# Altium PCB 388D_Control_v1_PCB1_harry.PcbDoc (part 3 of 5)
Units mil, origin at the board's own origin, x right, y up, seen from the top; angles counter-clockwise.
Board outline 4800 x 4000 mil, 6 copper layers (Top Layer, Singal Layer 2, Signal layer 3, Signal Layer 4, Signal Layer 5, Bottom Layer), stack 32.7 mil thick; 431 components, 469 nets, 2000 pads, 719 vias.
Unrouted connection lines stored in the file: 971.
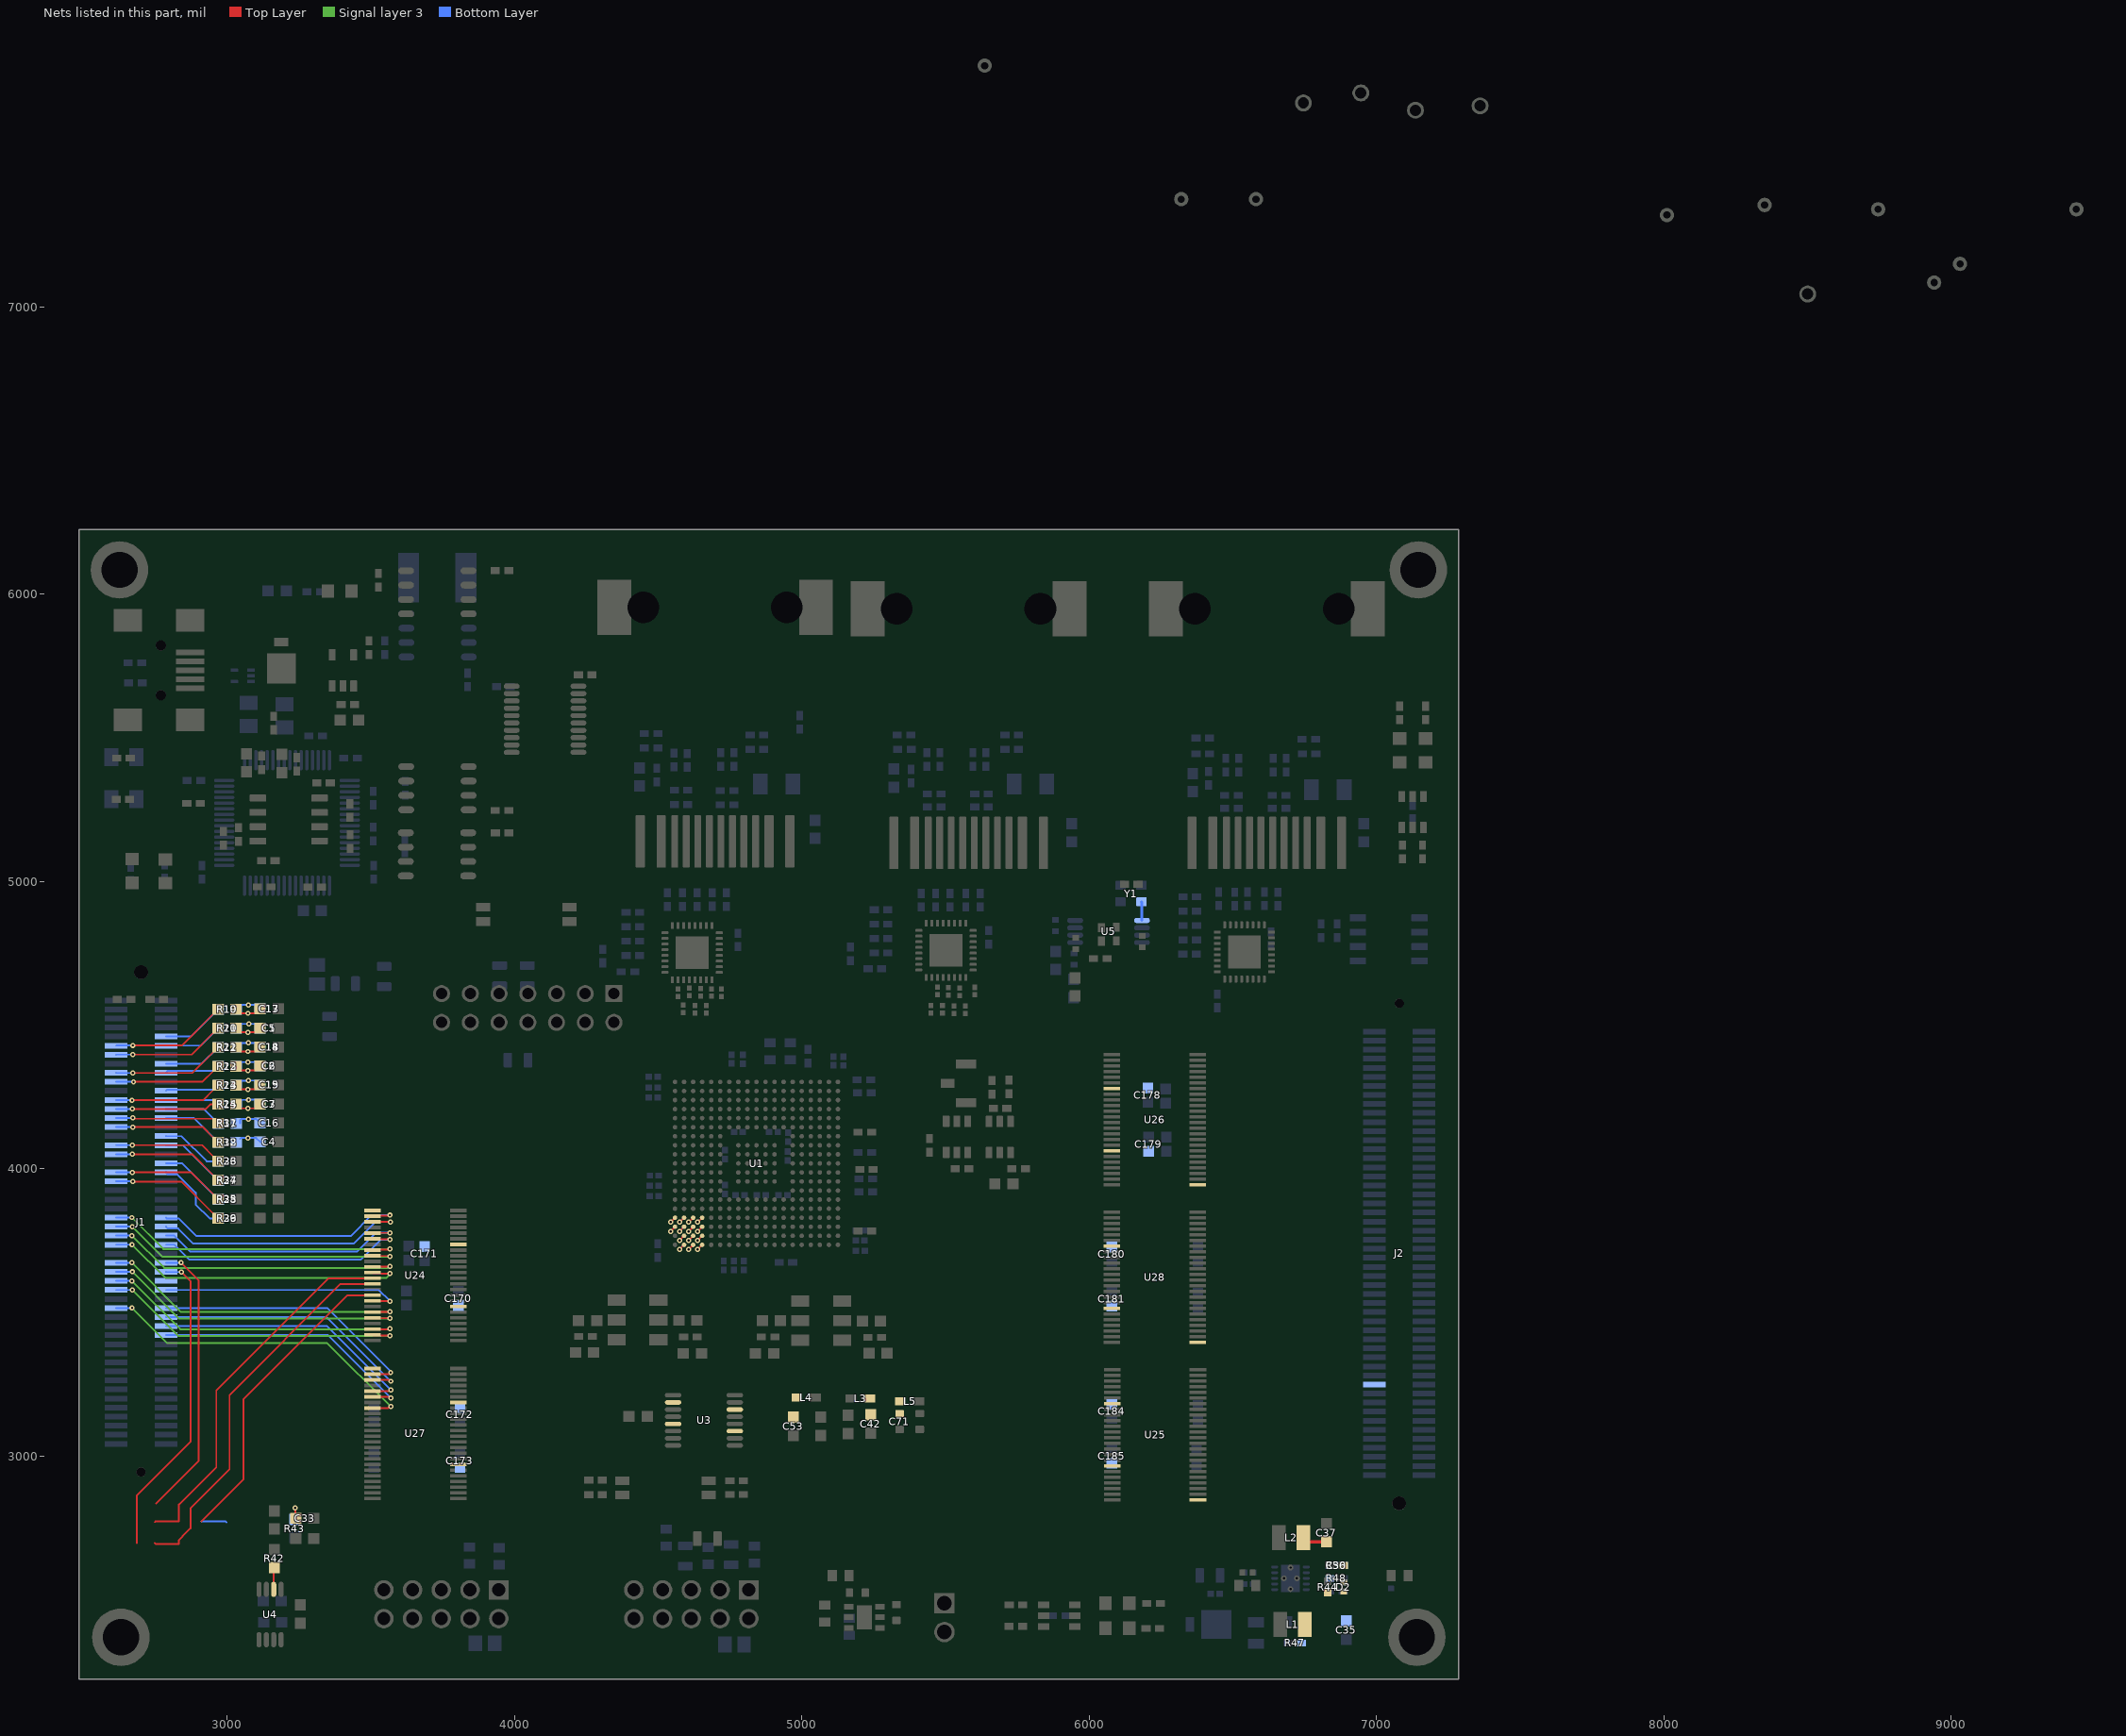
[diagram p3: the nets of this part, all layers, seen from the top]

## Part data (continued)
R77 R78 R81 R83: library part CMP-0026765-1, "RES, 10.0, 0.1%, 0.063 W, 0402", Manufacturer="TE Connectivity", Power_W=63mW, Supplier Part Number 1=A102583CT-ND, TempCo="25 ppm/C", Tolerance_%=0.1%, Value2=0.063W, Value_Code=10R0, ValueDisplayed=10.0, AEC Category=Q200, AEC Grade=N/A, AEC Qualified=N, ComponentLink1Description="Datasheet link", ComponentLink1URL=http://www.te.com/commerce/DocumentDelivery/DDEController?Action=srchrtrv&DocNm=1773200&DocType=DS&DocLang=English, CompType=Resistor, EIA_Code=E192, LatestRevisionDate=2017-03-09, MountType=SMT, PackageReference=0402, PartNumber=CPF0402B10RE1, Published=2008-06-26, Publisher="Texas Instruments", Res_ohm=10, RoHS=Y, SizeArea_mm2=0.5, SizeX_mm=1, SizeY_mm=0.5, SizeZ_mm=0.35, Supplier 1=Digi-Key, Supplier 2=Newark, Supplier 3=Mouser, Supplier Part Number 2=80P3855, Supplier Part Number 3=279-CPF0402B10RE1, Technology="Thin Film", U/M=EA, Value1=0.1%
R82 R84 R86: library part CMP-0081856-1, "RES, 0, 0%, 0.2 W, AEC-Q200 Grade 0, 0402", Manufacturer=Vishay-Dale, Power_W=200mW, Supplier Part Number 1=541-0.0YBTR-ND, Tolerance_%=0%, Value2=0.2W, Value_Code=0, AEC Category=Q200, AEC Grade=0, AEC Qualified=Y, ComponentLink1Description="Datasheet link", ComponentLink1URL=http://www.vishay.com/docs/20043/crcwhpe3.pdf, CompType=Resistor, MountType=SMT, PackageReference=0402, PartNumber=CRCW04020000Z0EDHP, Res_ohm=0, RoHS=Y, SizeArea_mm2=0.5, SizeAreaWB_mm2=3, SizeX_mm=1, SizeY_mm=0.5, SizeZ_mm=0.6, Supplier 1=Digi-Key, Supplier 2=Newark, Supplier 3=Mouser, Supplier Part Number 2=96Y9050, Supplier Part Number 3=71-CRCW04020000Z0EDH, Technology="Thick Film", Value1=0%, ValueDisplayed=0, VDC_V=50V
R87 R88 R90 R91 R98 R99 R105 R106 R119 R121 R129 R130: library part CMP-0026738-1, "RES, 49.9, 1%, 0.063 W, 0402", Manufacturer="Yageo America", Power_W=63mW, Supplier Part Number 1=311-49.9LRCT-ND, TempCo="100 ppm/C", Tolerance_%=1%, Value2=0.063W, Value_Code=49R9, ValueDisplayed=49.9, AEC Category=Q200, AEC Grade=N/A, AEC Qualified=N, ComponentLink1Description="Datasheet link", ComponentLink1URL=http://www.yageo.com/documents/recent/PYu-RC_Group_51_RoHS_L_1.pdf, CompType=Resistor, EIA_Code=E96, LatestRevisionDate=2017-03-09, MountType=SMT, PackageReference=0402, PartNumber=RC0402FR-0749R9L, Published=2008-06-26, Publisher="Texas Instruments", Res_ohm=49.9, RoHS=Y, SizeArea_mm2=0.5, SizeX_mm=1, SizeY_mm=0.5, SizeZ_mm=0.6, Supplier 1=Digi-Key, Supplier 2=Newark, Supplier 3=Mouser, Supplier Part Number 2=67R9942, Supplier Part Number 3=603-RC0402FR-0749R9L, Technology="Thick Film", U/M=EA, Value1=1%, VDC_V=50V
R89 R104 R128: library part CMP-0026413-2, "RES, 4.87 k, 1%, 0.063 W, AEC-Q200 Grade 0, 0402", Manufacturer=Vishay-Dale, Power_W=63mW, Supplier Part Number 1=541-4.87KLCT-ND, TempCo="100 ppm/C", Tolerance_%=1%, Value2=0.063W, Value_Code=4k87, ValueDisplayed=4.87k, AEC Category=Q200, AEC Grade=0, AEC Qualified=Y, ComponentLink1Description="Datasheet link", ComponentLink1URL=http://www.vishay.com/docs/20035/dcrcwe3.pdf, CompType=Resistor, EIA_Code=E96, MountType=SMT, PackageReference=0402, PartNumber=CRCW04024K87FKED, Res_ohm=4.87k, RoHS=E, SizeArea_mm2=0.5, SizeX_mm=1, SizeY_mm=0.5, SizeZ_mm=0.6, Supplier 1=Digi-Key, Supplier 2=Newark, Supplier 3=Mouser, Supplier Part Number 2=52K7047, Supplier Part Number 3=71-CRCW0402-4.87K-E3, Technology="Thick Film", Value1=1%, VDC_V=50V
R94 R110 R134: library part CMP-0026237-2, "RES, 2.49 k, 1%, 0.063 W, AEC-Q200 Grade 0, 0402", Manufacturer=Vishay-Dale, Power_W=63mW, Supplier Part Number 1=541-2.49KLCT-ND, TempCo="100 ppm/C", Tolerance_%=1%, Value2=0.063W, Value_Code=2k49, ValueDisplayed=2.49k, AEC Category=Q200, AEC Grade=0, AEC Qualified=Y, ComponentLink1Description="Datasheet link", ComponentLink1URL=http://www.vishay.com/docs/20035/dcrcwe3.pdf, CompType=Resistor, EIA_Code=E96, MountType=SMT, PackageReference=0402, PartNumber=CRCW04022K49FKED, Res_ohm=2.49k, RoHS=E, SizeArea_mm2=0.5, SizeX_mm=1, SizeY_mm=0.5, SizeZ_mm=0.6, Supplier 1=Digi-Key, Supplier 2=Newark, Supplier 3=Mouser, Supplier Part Number 2=52K6803, Supplier Part Number 3=71-CRCW0402-2.49K-E3, Technology="Thick Film", Value1=1%, VDC_V=50V
R96 R97 R109 R118 R133 R141: library part CMP-0025813-4, "RES, 470, 5%, 0.1 W, AEC-Q200 Grade 0, 0603", Manufacturer=Vishay-Dale, Power_W=100mW, Supplier Part Number 1=541-470GCT-ND, TempCo="200 ppm/C", Tolerance_%=5%, Value2=0.1W, Value_Code=470R, ValueDisplayed=470, AEC Category=Q200, AEC Grade=0, AEC Qualified=Y, ComponentLink1Description="Datasheet link", ComponentLink1URL=http://www.vishay.com/docs/20035/dcrcwe3.pdf, CompType=Resistor, EIA_Code=E24, MountType=SMT, PackageReference=0603, PartNumber=CRCW0603470RJNEA, Res_ohm=470, RoHS=E, SizeArea_mm2=1.28, SizeX_mm=1.6, SizeY_mm=0.8, SizeZ_mm=1, Supplier 1=Digi-Key, Supplier 2=Newark, Supplier 3=Mouser, Supplier Part Number 2=59M6817, Supplier Part Number 3=71-CRCW0603J-470-E3, Technology="Thick Film", Value1=5%, VDC_V=75V
R100 R101 R176 R177: library part CMP-0026938-5, "RES, 4.7 k, 5%, 0.063 W, AEC-Q200 Grade 0, 0402", Manufacturer=Vishay-Dale, Power_W=63mW, Supplier Part Number 1=541-4.7KJCT-ND, TempCo="200 ppm/C", Tolerance_%=5%, Value2=0.063W, Value_Code=4k70, ValueDisplayed=4.7k, AEC Category=Q200, AEC Grade=0, AEC Qualified=Y, ComponentLink1Description="Datasheet link", ComponentLink1URL=http://www.vishay.com/docs/20035/dcrcwe3.pdf, CompType=Resistor, EIA_Code=E24, MountType=SMT, PackageReference=0402, PartNumber=CRCW04024K70JNED, Res_ohm=4.7k, RoHS=E, SizeArea_mm2=0.5, SizeX_mm=1, SizeY_mm=0.5, SizeZ_mm=0.6, Supplier 1=Digi-Key, Supplier 2=Newark, Supplier 3=Mouser, Supplier Part Number 2=59M6733, Supplier Part Number 3=71-CRCW0402J-4.7K-E3, Technology="Thick Film", Value1=5%, VDC_V=50V
R102 R103 R111 R112 R113 R114 R115 R116 R125 R126 R127 R135 R136 R137 R138 R139: library part CMP-0027010-2, "RES, 2.2 k, 5%, 0.05 W, 0201", Manufacturer=Vishay-Dale, Power_W=50mW, Supplier Part Number 1=541-2.2KAGCT-ND, TempCo="200 ppm/C", Tolerance_%=5%, Value2=0.05W, Value_Code=2k20, ValueDisplayed=2.2k, AEC Category=Q200, AEC Grade=N/A, AEC Qualified=N, ComponentLink1Description="Datasheet link", ComponentLink1URL=http://www.vishay.com/docs/20052/crcw0201e3.pdf, CompType=Resistor, EIA_Code=E24, MountType=SMT, PackageReference=0201, PartNumber=CRCW02012K20JNED, Res_ohm=2.2k, RoHS=E, SizeArea_mm2=0.18, SizeX_mm=0.6, SizeY_mm=0.3, SizeZ_mm=0.26, Supplier 1=Digi-Key, Supplier 2=Newark, Supplier 3=Mouser, Supplier Part Number 2=48P7324, Supplier Part Number 3=71-CRCW02012K20JNED, Technology="Thick Film", Value1=5%, VDC_V=30V
R120: library part CMP-0026081-3, "RES, 1.27 k, 1%, 0.063 W, AEC-Q200 Grade 0, 0402", Manufacturer=Vishay-Dale, Power_W=63mW, Supplier Part Number 1=541-1.27KLCT-ND, TempCo="100 ppm/C", Tolerance_%=1%, Value2=0.063W, Value_Code=1k27, ValueDisplayed=1.27k, AEC Category=Q200, AEC Grade=0, AEC Qualified=Y, ComponentLink1Description="Datasheet link", ComponentLink1URL=http://www.vishay.com/docs/20035/dcrcwe3.pdf, CompType=Resistor, EIA_Code=E96, MountType=SMT, PackageReference=0402, PartNumber=CRCW04021K27FKED, Res_ohm=1.27k, RoHS=E, SizeArea_mm2=0.5, SizeX_mm=1, SizeY_mm=0.5, SizeZ_mm=0.6, Supplier 1=Digi-Key, Supplier 2=Newark, Supplier 3=Mouser, Supplier Part Number 2=52K6562, Supplier Part Number 3=71-CRCW0402-1.27K-E3, Technology="Thick Film", Value1=1%, VDC_V=50V
R143 R145 R149 R156: library part CMP-0026825-5, "RES, 10 k, 5%, 0.063 W, AEC-Q200 Grade 0, 0402", Manufacturer=Vishay-Dale, Power_W=63mW, Supplier Part Number 1=541-10KJCT-ND, TempCo="200 ppm/C", Tolerance_%=5%, Value2=0.063W, Value_Code=10k0, ValueDisplayed=10k, AEC Category=Q200, AEC Grade=0, AEC Qualified=Y, ComponentLink1Description="Datasheet link", ComponentLink1URL=http://www.vishay.com/docs/20035/dcrcwe3.pdf, CompType=Resistor, EIA_Code=E24, MountType=SMT, PackageReference=0402, PartNumber=CRCW040210K0JNED, Res_ohm=10k, RoHS=E, SizeArea_mm2=0.5, SizeX_mm=1, SizeY_mm=0.5, SizeZ_mm=0.6, Supplier 1=Digi-Key, Supplier 2=Newark, Supplier 3=Mouser, Supplier Part Number 2=59M6696, Supplier Part Number 3=71-CRCW0402J-10K-E3, Technology="Thick Film", Value1=5%, VDC_V=50V
R144 R152 R153 R155: library part CMP-0026822-3, "RES, 0, 5%, 0.063 W, AEC-Q200 Grade 0, 0402", Manufacturer=Vishay-Dale, Power_W=63mW, Supplier Part Number 1=541-0.0JCT-ND, TempCo="200 ppm/C", Tolerance_%=5%, Value2=0.063W, Value_Code=0000, ValueDisplayed=0, AEC Category=Q200, AEC Grade=0, AEC Qualified=Y, ComponentLink1Description="Datasheet link", ComponentLink1URL=http://www.vishay.com/docs/20035/dcrcwe3.pdf, CompType=Resistor, EIA_Code=E24, MountType=SMT, PackageReference=0402, PartNumber=CRCW04020000Z0ED, Res_ohm=0, RoHS=E, SizeArea_mm2=0.5, SizeX_mm=1, SizeY_mm=0.5, SizeZ_mm=0.6, Supplier 1=Digi-Key, Supplier 2=Newark, Supplier 3=Mouser, Supplier Part Number 2=52K6543, Supplier Part Number 3=71-CRCW0402-0-E3, Technology="Thick Film", Value1=5%, VDC_V=50V
R146 R147 R148 R151: library part CMP-0026852-3, "RES, 1.0 k, 5%, 0.063 W, AEC-Q200 Grade 0, 0402", Manufacturer=Vishay-Dale, Power_W=63mW, Supplier Part Number 1=541-1.0KJCT-ND, TempCo="200 ppm/C", Tolerance_%=5%, Value2=0.063W, Value_Code=1k00, ValueDisplayed=1.0k, AEC Category=Q200, AEC Grade=0, AEC Qualified=Y, ComponentLink1Description="Datasheet link", ComponentLink1URL=http://www.vishay.com/docs/20035/dcrcwe3.pdf, CompType=Resistor, EIA_Code=E24, MountType=SMT, PackageReference=0402, PartNumber=CRCW04021K00JNED, Res_ohm=1k, RoHS=E, SizeArea_mm2=0.5, SizeX_mm=1, SizeY_mm=0.5, SizeZ_mm=0.6, Supplier 1=Digi-Key, Supplier 2=Newark, Supplier 3=Mouser, Supplier Part Number 2=59M6691, Supplier Part Number 3=71-CRCW0402J-1.0K-E3, Technology="Thick Film", Value1=5%, VDC_V=50V
R154: library part CMP-0026834-3, "RES, 12 k, 5%, 0.063 W, AEC-Q200 Grade 0, 0402", Manufacturer=Vishay-Dale, Power_W=63mW, Supplier Part Number 1=541-12KJCT-ND, TempCo="200 ppm/C", Tolerance_%=5%, Value2=0.063W, Value_Code=12k0, ValueDisplayed=12k, AEC Category=Q200, AEC Grade=0, AEC Qualified=Y, ComponentLink1Description="Datasheet link", ComponentLink1URL=http://www.vishay.com/docs/20035/dcrcwe3.pdf, CompType=Resistor, EIA_Code=E24, MountType=SMT, PackageReference=0402, PartNumber=CRCW040212K0JNED, Res_ohm=12k, RoHS=E, SizeArea_mm2=0.5, SizeX_mm=1, SizeY_mm=0.5, SizeZ_mm=0.6, Supplier 1=Digi-Key, Supplier 2=Newark, Supplier 3=Mouser, Supplier Part Number 2=89M6603, Supplier Part Number 3=71-CRCW040212K0JNED, Technology="Thick Film", Value1=5%, VDC_V=50V
R157: library part CMP-009-00014-5, Case/Package=0603, Max Operating Temperature=155°C, Min Operating Temperature=-55°C, Power=100mW, Tolerance=1%, Voltage Rating=50V, Mounting Technology=SM, Pins=2, RoHS Compliant=True
R158 R159 R162 R170 R171 R172 R173 R174 R175: library part CMP-009-00174-4, "Chip Resistor, 4,7 Ohms, +/-5 %, 125 mW, -55 to 155 degC, 0805", Case/Package=0805, Max Operating Temperature=155°C, Min Operating Temperature=-55°C, Power=125mW, Tolerance=5%, Pins=2
R160 R161: library part CMP-009-00014-5, "Chip Resistor, 1 KOhm, +/-1%, 0.1 W, -55 to 155 degC, 0603 (1608 Metric)", Case/Package=0603, Max Operating Temperature=155°C, Min Operating Temperature=-55°C, Power=100mW, Tolerance=1%, Voltage Rating=50V, Mounting Technology=SM, Pins=2, RoHS Compliant=True
S1 S2: library part CMP-0002233-1, "Switch, Dual SPDT,  2 Pos, 0.1A, 6VDC, SMD", CurrentRating_mA=100A, Manufacturer="Copal Electronics", Supplier Part Number 1=CASD20JCT-ND, Circuit=SPDT, ComponentLink1Description="Datasheet Link", ComponentLink1URL=http://www.nidec-copal-electronics.com/e/catalog/switch/cas.pdf, CompType=Switch, LatestRevisionDate=2017-03-09, MountType=SMT, Orientation="Top Actuated", PackageReference=5.4x3.9mm, PartNumber=CAS-D20TA, PositionCount=2, Publisher="Texas Instruments", RoHS=Y, Supplier 1=Digi-Key, SwitchFunction=On-On, VDC_V=6V
S3: library part CMP-0002193-2, "Switch, SPST-NO, Off-Mom, 12 V, SMD", CurrentRating_mA=50A, Manufacturer="Omron Electronic Components", Supplier Part Number 1=SW1021CT-ND, Circuit=SPST-NO, ComponentLink1Description="Datasheet URL", ComponentLink1URL=http://www.omron.com/ecb/products/pdf/en-b3u.pdf, CompType=Switch, LatestRevisionDate=2017-03-09, MountType=SMT, Orientation="Top Actuated", PackageReference="SMD, 3-Leads, Body 3x2.5mm", PartNumber=B3U-1100P, PositionCount=1, Publisher="Texas Instruments", RoHS=Y, Supplier 1=Digi-Key, Supplier 2=Newark, Supplier 3=Mouser, Supplier Part Number 2=39M4619, Supplier Part Number 3=653-B3U-1100P, SwitchFunction=Off-Mom, VDC_V=12V
S4 S5: library part CMP-0002230-1, "Switch, SPST, 2 Pos, 25mA, 24VDC, SMD", CurrentRating_mA=25A, Manufacturer="CTS Electrocomponents", Supplier Part Number 1=CT2182LPST-ND, Circuit=SPST, ComponentLink1Description="Datasheet Link", ComponentLink1URL=http://www.ctscorp.com/components/Datasheets/218.pdf, CompType=Switch, LatestRevisionDate=2017-03-09, MountType=SMT, Orientation="Top Actuated", PackageReference=3.71x5.8mm, PartNumber=218-2LPST, PositionCount=2, Publisher="Texas Instruments", RoHS=Y, Supplier 1=Digi-Key, Supplier 2=Mouser, Supplier Part Number 2=774-2182LPST, SwitchFunction=Off-On, VDC_V=24V
TP1 TP2 TP3 TP4 TP14: library part CMP-002-00037-2, "Test Point, Orange, Height 4.6 mm, Tail Length 3 mm, 1-Pin THD, RoHS", Colour=Orange, Manufacturer=Keystone, Package Description="1-Pin Through Hole Device, Dia 2.54 mm", Package Quantity=10, Case/Package=5003, Connector Type=TestPoint, Contact Material=Bronze, Contact Plating=Tin, Datasheet URL=http://keyelco.com/userAssets/file/M65p56.pdf, Datasheet Version=Jun-15, Diameter=2.54mm, Manufacturer URL=http://www.keyelco.com/, Mounting Technology=TH, Package Reference=5003, Packaging=Bulk, Pins=1, RoHS Compliant=True
TP5 TP6 TP7 TP8 TP9 TP10 TP11 TP12 TP13: library part CMP-0078143-3, "TEST POINT.  No entry in BOM.", Manufacturer=N/A, CompType=Testpoint, PackageReference=N/A, PartNumber=N/A
U1: library part CMP-012-000147-1, "TMS320F28388DZWTS, ZWT0337A (NFBGA-337)", Alternate Manufacturer="Texas Instruments", AEC Category=Q200, AEC Qualified=N, Available Preview Images=2D, ComponentLink1Description="Datasheet Link", ComponentLink1URL=http://www.ti.com/lit/ds/symlink/tms320f28388d.pdf, ComponentLink2Description="Product Folder", ComponentLink2URL=http://www.ti.com/product/tms320f28388d, ComponentLink3Description="Online Datasheet", ComponentLink3URL=http://www.ti.com/product/tms320f28388d/datasheet, CompType=IC, Design Item ID=TMS320F28388DZWTS, Manufacturer="Texas Instruments", MountType=SMT, PackageDescription=NFBGA-337, PackageReference=ZWT0337A, PartNumber=TMS320F28388DZWTS, SizeArea_mm2=256, SizeAreaWB_mm2=324, SizeX_mm=16, SizeY_mm=16, SizeZ_mm=1.4, Source=SamacSys.SchLib
U2: library part CMP-0051789-2, "Dual Buffer/Driver with Open-Drain Output, DBV0006A, LARGE T&R", F @ Nom Voltage(Max)(Mhz)=150, Generic Part Number=SN74LVC2G07, ICC @ Nom Voltage(Max)(mA)=0.01, Manufacturer="Texas Instruments", Operating Temperature Range(C)="-40 to 125", Rating=Catalog, tpd @ Nom Voltage(Max)(ns)=8.6,4.4,3.7,2.9, Voltage(Nom)(V)=1.8,2.5,3.3,5, 3-State Output=No, AEC Category=Q200, AEC Qualified=N, Bits(#)=2, ComponentLink1Description="Datasheet Link", ComponentLink1URL=http://www.ti.com/lit/ds/symlink/sn74lvc2g07.pdf, ComponentLink2Description="Product Folder", ComponentLink2URL=http://www.ti.com/product/sn74lvc2g07, ComponentLink3Description="Online Datasheet", ComponentLink3URL=http://www.ti.com/product/sn74lvc2g07/datasheet, CompType=IC, DatasheetVersion=SCES308K, Green_EU RoHS=Passed, Green_EU RoHS-2=Passed, Green_Lifecycle=Active, Green_REACh=Passed, Input Type=CMOS/TTL, Logic=True, MountType=SMT, Output Drive (IOL/IOH)(Max)(mA)=32/-32, Output Type=CMOS, PackageDescription=SOT-23-6, PackageReference=DBV0006A, PartNumber=SN74LVC2G07DBVR, RoHS=Y, Schmitt Trigger=No, SizeArea_mm2=8.12, SizeAreaWB_mm2=14.82, SizeX_mm=2.8, SizeY_mm=2.9, SizeZ_mm=1.45, Sub-Family="Inverting Buffer/Driver", Technology Family=LVC, VCC(Max)(V)=5.5, VCC(Min)(V)=1.65
U3: library part CMP-014-00004-2, "High-Speed, Single-Supply, Rail-to-Rail Operational Amplifier MicroAmplifier(TM) Series, 2.7 to 5.5 V, -55 to 150 degC, 16-pin SOP (DBQ16), Green (RoHS & no Sb/Br)", Case/Package="16-Pin, Plastic Small Outline, Body 3.9 x 4.9 mm, Pitch 0.635 mm", Manufacturer="Texas Instruments", Total Supply Voltage(Max)(+5V is 5, +/-5V is 10)=5.5, Total Supply Voltage(Min)(+5V is 5, +/-5V is 10)=2.7, Available Preview Images=2D, CMRR(Min)(dB)=66, Code_JEDEC=MO-137, ComponentLink1Description="Manufacturer URL", ComponentLink1URL=http://www.ti.com/, ComponentLink2Description=Datasheet, ComponentLink2URL=http://www.ti.com/general/docs/lit/getliterature.tsp?genericPartNumber=OPA4350&fileType=pdf, ComponentLink3Description="Package Specification", ComponentLink3URL=http://www.ti.com/litv/pdf/msoi004g, DatasheetVersion=SBOS099C, Design Item ID=CMP-0041147-1, Eco-Plan="Green (RoHS & no Sb/Br)", IIB(Max)(pA)=10, Iq per channel(Max)(mA)=7.5, Mounting Technology="Surface Mount", Number of Channels=4, Offset Drift(Typ)(uV/C)=4, PackageReference=DBQ0016A, PackageVersion="4073301-2/H, 10/2008", Slew Rate(Typ)(V/us)=22, Source=SamacSys.SchLib, Sub Family="Low Input Bias Current Amp (<=10pA), Low Offset Voltage Amplifier (<=500uV), Low Supply Voltage Amplifier (<=2.7V), Precision Amplifier", Vio (25C)(Max)(mV)=0.5, Vn at 1kHz(Typ)(nV/rtHz)=18
U4: library part CMP-0032596-2, "Low Noise, Very Low Drift, Precision Series Voltage Reference, DGK0008A (VSSOP-8)", Manufacturer="Texas Instruments", Rating=Catalog, Temp Coeff(Max)(ppm/ degree C)=3, AEC Category=Q200, AEC Qualified=N, Code_JEDEC=MO-187-AA, ComponentLink1Description="Datasheet Link", ComponentLink1URL=http://www.ti.com/lit/ds/symlink/ref5030.pdf, ComponentLink2Description="Product Folder", ComponentLink2URL=http://www.ti.com/product/ref5030, ComponentLink3Description="Online Datasheet", ComponentLink3URL=http://www.ti.com/product/ref5030/datasheet, CompType=IC, DatasheetVersion=SBOS410E, Eco-Plan="Green (RoHS & no Sb/Br)", Initial Accuracy @ 25/deg C(%)=0.05, Iout/Iz(Max)(mA)=10, Iq(Max)(uA)=1000, MountType=SMT, PackageDescription=VSSOP-8, PackageReference=DGK0008A, PackageVersion=4073329/E, PartNumber=REF5030IDGKT, RoHS=Y, SizeArea_mm2=14.7, SizeAreaWB_mm2=23.6, SizeX_mm=4.9, SizeY_mm=3, SizeZ_mm=1.1, SubFamily="Series Voltage Reference", VI(Max)(V)=18, VI(Min)(V)=3.2, VO(V)=3
U5: library part CMP-052-000006-1, "Low Jitter, 1:4 LVCMOS Fan-out Clock Buffer, PW0008A (TSSOP-8)", Alternate Manufacturer="Texas Instruments", Available Preview Images=2D, ComponentLink1Description="Datasheet Link", ComponentLink1URL=http://www.ti.com/lit/ds/symlink/cdclvc1104.pdf, CompType=IC, Design Item ID=CDCLVC1104PW, Green_EU RoHS=Passed, Green_EU RoHS-2=Passed, Green_Lifecycle=Active, Green_REACh=Passed, LatestRevisionDate=2017-06-09, Manufacturer="Texas Instruments", MountType=SMT, PackageDescription=TSSOP-8, PackageReference=PW0008A, PartNumber=CDCLVC1104PW, Publisher="Texas Instruments", RoHS=Y, SizeArea_mm2=19.2, SizeAreaWB_mm2=42.0, SizeX_mm=6.4, SizeY_mm=3.0, SizeZ_mm=1.2, Source=MCU063B.SCHLIB, U/M=EA
U6 U7: library part CMP-052-000005-1, "High-Accuracy, Fixed-Threshold OV/UV Monitor, DDC0006A (SOT-23-T-6)", Alternate Manufacturer="Texas Instruments", Alternate PartNumber=TPS3702CX33DDCR, AEC Category=Q200, AEC Qualified=N, Available Preview Images=2D, ComponentLink1Description="Datasheet Link", ComponentLink1URL=http://www.ti.com/lit/ds/symlink/tps3702.pdf, ComponentLink2Description="Product Folder", ComponentLink2URL=http://www.ti.com/product/tps3702, ComponentLink3Description="Online Datasheet", ComponentLink3URL=http://www.ti.com/product/tps3702/datasheet, CompType=IC, Design Item ID=TPS3702CX33DDCT, Manufacturer="Texas Instruments", MountType=SMT, PackageDescription=SOT-23-T-6, PackageReference=DDC0006A, PartNumber=TPS3702CX33DDCT, RoHS=Y, SizeArea_mm2=4.8675, SizeAreaWB_mm2=10.4675, SizeX_mm=1.65, SizeY_mm=2.95, SizeZ_mm=0.87, Source=MCU063B.SCHLIB
U8: library part CMP-014-000012-1, "Dual, Adjustable, 600mA and 1000mA, 2.25MHz Step-Down Converter with 1-Wire Interface in QFN 10-VSON -40 to 85", Alternate_PartNumber=TPS62420DRCT, Manufacturer="Texas Instruments", CompType=IC, Copyright="Copyright (C) 2025 Ultra Librarian. All rights reserved.", Design Item ID=TPS62420DRCR, Manufacturer_Name="Texas Instruments", Manufacturer_Part_Number=TPS62420DRCR, MountType=SMT, PackageReference=DRC0010J, PartNumber=TPS62420DRCR, RefDes=RefDes, RoHS=Y, Source=SamacSys.SchLib, Type=TYPE
U9 U10 U11: library part CMP-0076010-4, "Robust, Low Power 10/100 Ethernet Physical Layer Transceiver, RHB0032B (VQFN-32)", Alternate Manufacturer="Texas Instruments", Alternate PartNumber=DP83822IRHBT, AEC Category=Q200, AEC Qualified=N, ComponentLink1Description="Datasheet Link", ComponentLink1URL=http://www.ti.com/lit/ds/symlink/dp83822i.pdf, ComponentLink2Description=ComponentLink2Description, ComponentLink2URL=http://www.ti.com/product/dp83822i, ComponentLink3Description="Online Datasheet", ComponentLink3URL=http://www.ti.com/product/GPN/datasheet, CompType=IC, Manufacturer="Texas Instruments", MountType=SMT, PackageDescription=VQFN-32, PackageReference=RHB0032B, PartNumber=DP83822IRHBR, RoHS=Y, SizeArea_mm2=25.0, SizeAreaWB_mm2=49.0, SizeX_mm=5.0, SizeY_mm=5.0, SizeZ_mm=1.0
U12: library part CMP-0082059-1, "16 Kb I2C EEPROM Serial, SOIC-8", Manufacturer="ON Semiconductor", Supplier Part Number 1=CAT24C16WI-GT3CT-ND, ComponentLink1Description="Datasheet URL", ComponentLink1URL=https://www.onsemi.com/pub/Collateral/CAT24C01-D.PDF, MountType=SMT, PackageReference=SOIC-8, PartNumber=CAT24C16WI-GT3, RoHS=Y, SizeArea_mm2=29.351, SizeAreaWB_mm2=55.131, SizeX_mm=5.99, SizeY_mm=4.9, SizeZ_mm=1.75, Supplier 1=Digi-Key, Supplier 2=Newark, Supplier 3=Mouser, Supplier Part Number 2=23AC2979, Supplier Part Number 3=698-CAT24C16WI-GT3
U13: library part CMP-0073823-1, "Low-Noise, High PSRR, RF 200-mA Low-Dropout Linear Regulators, DBV0005A (SOT-23-5)", Alternate Manufacturer="Texas Instruments", Alternate PartNumber=TPS73033DBVT, ComponentLink1Description="Datasheet Link", ComponentLink1URL=http://www.ti.com/lit/ds/symlink/tps730.pdf, CompType=IC, Footprint Path 6=C:\AltiumLibraries\Footprints\TI\.PcbLib, Green_EU RoHS=Passed, Green_EU RoHS-2=Passed, Green_Lifecycle=Active, Green_REACh=Passed, LatestRevisionDate=2017-06-09, Manufacturer="Texas Instruments", MountType=SMT, PackageDescription=SOT-23-5, PackageReference=DBV0005A, PartNumber=TPS73033DBVR, Publisher="Texas Instruments", RoHS=Y, SizeArea_mm2=8.12, SizeAreaWB_mm2=14.82, SizeX_mm=2.8, SizeY_mm=2.9, SizeZ_mm=1.45, U/M=EA
U14: library part CMP-0004796-1, "Dual High Speed USB To Multipurpose UART/FIFO IC, LQFP-64", Manufacturer=FTDI, Supplier Part Number 1=768-1024-1-ND, ComponentLink1Description="Datasheet URL", ComponentLink1URL=http://www.ftdichip.com/Support/Documents/DataSheets/ICs/DS_FT2232H.pdf, LatestRevisionDate=09/03/2017, MountType=SMT, PackageReference=LQFP_10x10mm, PartNumber=FT2232HL-REEL, Publisher="Texas Instruments", RoHS=Y, Supplier 1=Digi-Key, Supplier 2=Mouser, Supplier Part Number 2=895-FT2232HL
U15: library part CMP-0043096-2, "Low-Capacitance + / - 15 kV ESD-Protection Array for High-Speed Data Interfaces, 2 Channels, -40 to +85 degC, 5-pin SOT (DRL), Green (RoHS & no Sb/Br)", Breakdown Voltage(Min)(V)=11, IO Capacitance(Typ)(pF)=1.5, IO Leakage Current(nA)=1, Manufacturer="Texas Instruments", ComponentLink1Description="Manufacturer URL", ComponentLink1URL=http://www.ti.com/, ComponentLink2Description=Datasheet, ComponentLink2URL=http://www.ti.com/general/docs/lit/getliterature.tsp?genericPartNumber=TPD2E001&fileType=pdf, ComponentLink3Description="URL Link1", ComponentLink3URL=SamplesURL:http://www.ti.com/product/tpd2e001#samples, DatasheetVersion=SLLS684F, Eco-Plan="Green (RoHS & no Sb/Br)", IEC 61000-4-2 Air-Gap(+/- kV)=15, IEC 61000-4-2 Contact(+/- kV)=8, Mounting Technology="Surface Mount", PackageDescription="5-Pin Plastic Small Outline, Flat Lead 0.5 mm Pitch", PackageReference=DRL0005A, PackageVersion="revD, Aug-2007", PartNumber=TPD2E001DRLR, SubFamily="ESD Solution", USB High Speed=TRUE
U16: library part CMP-0005261-2, "2K Microwire Compatible Serial EEPROM, SOIC-8", Manufacturer=Microchip, Supplier Part Number 1=93LC56C-I/SN-ND, ComponentLink1Description="Datasheet URL", ComponentLink1URL=http://ww1.microchip.com/downloads/en/DeviceDoc/21794G.pdf, LatestRevisionDate=09/03/2017, MountType=SMT, PackageReference=SOIC-8, PartNumber=93LC56C-I/SN, Publisher="Texas Instruments", RoHS=Y, SizeArea_mm2=29.351, SizeAreaWB_mm2=55.131, SizeX_mm=5.99, SizeY_mm=4.9, SizeZ_mm=1.75, Supplier 1=Digi-Key, Supplier 2=Newark, Supplier 3=Mouser, Supplier Part Number 2=30H4775, Supplier Part Number 3=579-93LC56C-I/SNG
U17 U19 U20 U218: library part CMP-0029375-1, "25 Mbps Dual Channels, 2 / 0, Digital Isolator, 3.3 V / 5 V, -40 to +125 degC, 8-pin SOIC (D), Green (RoHS & no Sb/Br)", Insulation Rating(VRMS)=2500, Manufacturer="Texas Instruments", Rating=Catalog, Supply Voltage(s)(V)="3.3, 5", Channel Configuration=2/01/2000, ComponentLink1Description="Manufacturer URL", ComponentLink1URL=http://www.ti.com/, ComponentLink2Description=Datasheet, ComponentLink2URL=http://www.ti.com/general/docs/lit/getliterature.tsp?genericPartNumber=ISO7220C&fileType=pdf, ComponentLink3Description="URL Link1", ComponentLink3URL=SamplesURL:http://www.ti.com/product/iso7220c#samples, Datarate(Mbps)=25, DatasheetVersion=SLLS755L, Eco-Plan="Green (RoHS & no Sb/Br)", Input Noise Filter=Yes, Mounting Technology="Surface Mount", PackageDescription="8-Pin Plastic Small Outline Integrated Circuit, 4.9 x 3.9 mm, Pitch 1.27 mm Pitch", PackageReference=D0008B, PackageVersion="revM, Jun-2011", PartNumber=ISO7220CD, Prop Delay(Max)(ns)=42, SubFamily=Isolator, Thermal Shutdown=No, TTL/CMOS Input Threshold=TTL
U18: library part CMP-0051777-2, "Dual Inverter Buffer/Driver with Open-Drain Output, DBV0006A, LARGE T&R", F @ Nom Voltage(Max)(Mhz)=150, Generic Part Number=SN74LVC2G06, ICC @ Nom Voltage(Max)(mA)=0.01, Manufacturer="Texas Instruments", Operating Temperature Range(C)="-40 to 125,-40 to 85", Rating=Catalog, tpd @ Nom Voltage(Max)(ns)=8.2,4.4,3.9,3.4, Voltage(Nom)(V)=1.8,2.5,3.3,5, 3-State Output=No, Bits(#)=2, DatasheetVersion=SCES307I, Input Type=CMOS/TTL, Logic=Inverting, Output Drive (IOL/IOH)(Max)(mA)=32/-32, Output Type=CMOS, PackageReference=DBV0006A, PartNumber=SN74LVC2G06DBVR, Schmitt Trigger=No, Sub-Family="Inverting Buffer/Driver", Technology Family=LVC, VCC(Max)(V)=5.5, VCC(Min)(V)=1.65
U21: library part CMP-0047070-3, "Octal Buffer/Driver With 3-State OUtputs, PW0020A (TSSOP-20)", Alternate Manufacturer="Texas Instruments", Alternate PartNumber=SN74ALVC244PW, F @ Nom Voltage(Max)(Mhz)=100, Generic Part Number=SN74ALVC244, ICC @ Nom Voltage(Max)(mA)=0.024, Operating Temperature Range(C)="-40 to 85", Rating=Catalog, tpd @ Nom Voltage(Max)(ns)=4.4,3.1,2.8, Voltage(Nom)(V)=1.8,2.5,2.7,3.3, AEC Category=Q200, AEC Qualified=N, Bits(#)=8, Code_JEDEC=MO-153, ComponentLink1Description="Datasheet Link", ComponentLink1URL=http://www.ti.com/lit/ds/symlink/sn74alvc244.pdf, ComponentLink2Description="Product Folder", ComponentLink2URL=http://www.ti.com/product/sn74alvc244, ComponentLink3Description="Online Datasheet", ComponentLink3URL=http://www.ti.com/product/sn74alvc244/datasheet, CompType=IC, DatasheetVersion=SCES188G, Input Type=LVTTL, Manufacturer="Texas Instruments", MountType=SMT, Output Type=LVTTL, PackageDescription=TSSOP-20, PackageReference=PW0020A, PackageVersion=http://www.ti.com/lit/ml/mpds362/mpds362.pdf, PartNumber=SN74ALVC244PWR, RoHS=Y, SizeArea_mm2=43.56, SizeAreaWB_mm2=73.96, SizeX_mm=6.6, SizeY_mm=6.6, SizeZ_mm=1.2, VCC(Max)(V)=3.6, VCC(Min)(V)=1.65
U23: library part CMP-031-00010-2, "Last Shipments - LDO Regulator", Manufacturer_Name=onsemi, Mouser Part Number=863-NCP606MN18T2G, Arrow Part Number=NCP606MN18T2G, Arrow Price/Stock=https://www.arrow.com/en/products/ncp606mn18t2g/on-semiconductor, Datasheet Link=https://www.onsemi.com/download/data-sheet/pdf/NCP605-D.PDF, Design Item ID=NCP606MN18T2G, Height=1mm, Manufacturer_Part_Number=NCP606MN18T2G, Mouser Price/Stock=https://www.mouser.com/Search/Refine.aspx?Keyword=863-NCP606MN18T2G, Source=SamacSys.SchLib
U24 U25 U26 U27 U28: library part CMP-031-00095-1, "16-Bit Dual-Supply Bus Transceiver", Manufacturer_Name="Texas Instruments", Mouser Part Number=595-SN74LVCH16T245GR, Arrow Part Number=SN74LVCH16T245DGGR, Arrow Price/Stock=https://www.arrow.com/en/products/sn74lvch16t245dggr/texas-instruments, Datasheet Link=http://www.ti.com/lit/gpn/sn74lvch16t245, Design Item ID=SN74LVCH16T245DGGR, Height=1.2mm, Manufacturer_Part_Number=SN74LVCH16T245DGGR, Mouser Price/Stock=https://www.mouser.co.uk/ProductDetail/Texas-Instruments/SN74LVCH16T245DGGR?qs=dT9u2OTAaVU%2FCf3PTalIAw%3D%3D, Source=388D_Control_v1.SchLib
Y1: library part CMP-052-000000-1, "Oscillator, 25 MHz, 15 pF, SMD", Frequency Stability="10 ppm", Frequency_Fixed=25MHz, Load Capacitance=15pF, Manufacturer="ECS Inc.", PartNumber=ECS-2520S33-250-FN-TR, AEC Category=Q200, AEC Grade=N/A, AEC Qualified=N, Available Preview Images=2D, ComponentLink1Description="Datasheet Link", ComponentLink1URL=https://www.ecsxtal.com/store/pdf/ECS-2520S.pdf, CompType=Oscillator, Design Item ID=CMP-0082061-2, MountType=SMT, PackageReference=2x2.5mm, RoHS=Y, SizeArea_mm2=5, SizeAreaWB_mm2=10.5, SizeX_mm=2, SizeY_mm=2.5, SizeZ_mm=1, Source=MCU063B.SCHLIB, TaMax_C=85°C, TaMin_C=-40°C
Y2: library part CMP-0004646-3, "Crystal, 12 MHz, 20pF, SMD", Frequency Stability=+/-50ppm, Frequency_Fixed=12MHz, Manufacturer="ECS Inc.", Supplier Part Number 1=XC1118CT-ND, ComponentLink1Description="Datasheet Link", ComponentLink1URL=http://www.ecsxtal.com/store/pdf/ecx_53b.pdf, CompType=Crystal, MountType=SMT, PackageReference=5x3.2mm, PartNumber=ECS-120-20-30B-TR, RoHS=Y, Supplier 1=Digi-Key, Supplier 2=Mouser, Supplier Part Number 2=520-ECS-120-20-30B, TaMax_C=70°C, TaMin_C=-20°C

## Free pads (board coordinates)
  round 200 hole 126 unplated: 2(2625,6085) 2(2630,2370) 2(7140,2370) 2(7145,6085)

## Via types
v1: diameter 18, hole 8, Top Layer to Bottom Layer, tented both sides, 703 vias
v2: diameter 19.68, hole 7.87, Top Layer to Bottom Layer, tented both sides, 15 vias
v3: diameter 18/18/18/18/18/18 (per signal layer), hole 8, Top Layer to Bottom Layer, tented both sides, 1 vias

## Nets (pads, with @x,y where several pads share a name; then routed paths per layer and width w, separated by ;. In a path a pad name is that pad's centre, name@x,y a point inside that pad or via, vN(x,y) a via of type N, cw(c..) or ccw(c..) an arc to the next point about the centre after c; other vN are vias at no path point)
1V2: C36.1 C37.1 C71.2 D2.2 L2.2 L5.1 R50.2 | length 86.3
  Top Layer w10: L2.2@6745,2717.28 6760.27,2702.01 C37.1@6825,2702.01
3V3: C35.1 C42.1 C53.1 C170.1 C171.1 C172.1 C173.1 C178.1 C179.1 C180.1 C181.1 C184.1 C185.1 D2.1 J2.21 L1.2 L3.1 L4.1 R44.2 R47.2 R48.2 U24.1 U24.31 U24.42 U25.1 U25.31 U25.42 U26.1 U26.31 U26.42 U27.1 U27.31 U27.42 U28.1 U28.31 U28.42
25MHZ_CLK: U5.1 Y1.3 | length 65.8
  Bottom Layer w10: Y1.3@6181.42,4929.83 6183.14,4928.11 U5.1@6183.14,4864.76
1415_N: C4.1 R18.1 U1.U4 | length 98.3
  Top Layer w6.25: v1(4637.05,3783.03) U1.U4@4652.8,3798.78
  Bottom Layer w6.25: R18.1@3045.54,4104.95 3048.3,4107.7 3100.77,4107.7 C4.1@3114.7,4093.77
  other v1: 3071.54,4107.7
1415_P: C16.1 R17.1 U1.T4 | length 110.1
  Top Layer w6.25: v1(4637.05,3814.53) U1.T4@4652.8,3830.28
  Bottom Layer w6.25: R17.1@3045.54,4159.61 3045.54,4171.13 3048.6,4174.18 3073.06,4174.18 v1(3073.54,4173.7) 3100.91,4173.7 C16.1@3114.7,4159.9
A0A1_N: C1.1 R11.1 U1.T1 | length 117.1
  Top Layer w6.25: v1(4542.56,3814.53) U1.T1@4558.31,3830.28
  Bottom Layer w6.25: R11.1@3032.04,4489.52 3047.22,4504.7 v1(3075.54,4504.7) 3100.57,4504.7 C1.1@3114.7,4490.56
A0A1_P: C13.1 R10.1 U1.U1 | length 116.9
  Top Layer w6.25: v1(4542.56,3783.03) U1.U1@4558.31,3798.78
  Bottom Layer w6.25: R10.1@3032.04,4555.7 3047.04,4570.7 3100.7,4570.7 C13.1@3114.7,4556.7
  other v1: 3073.54,4570.7
A2A3_N: C2.1 R13.1 U1.T2 | length 116.2
  Top Layer w6.25: v1(4574.06,3814.53) U1.T2@4589.8,3830.28
  Bottom Layer w6.25: R13.1@3032.38,4357.15 3046.93,4371.7 3101.3,4371.7 C2.1@3114.7,4358.3
  other v1: 3072.54,4371.7
A2A3_P: C14.1 R12.1 U1.U2 | length 117.2
  Top Layer w6.25: v1(4574.06,3783.03) U1.U2@4589.8,3798.78
  Bottom Layer w6.25: R12.1@3032.04,4423.33 3047.4,4438.7 3100.43,4438.7 C14.1@3114.7,4424.43
  other v1: 3073.54,4438.7
A4A5_N: C3.1 R15.1 U1.T3 | length 110.4
  Top Layer w6.25: v1(4605.55,3814.53) U1.T3@4621.3,3830.28
  Bottom Layer w6.25: R15.1@3045.54,4225.79 3045.54,4237.31 3048.6,4240.37 3074.21,4240.37 v1(3074.54,4240.7) 3100.04,4240.7 C3.1@3114.7,4226.04
A4A5_P: C15.1 R14.1 U1.U3 | length 111.1
  Top Layer w6.25: v1(4605.55,3783.03) U1.U3@4621.3,3798.78
  Bottom Layer w6.25: R14.1@3045.54,4291.97 3045.54,4303.49 3048.6,4306.55 3072.39,4306.55 v1(3073.54,4307.7) 3099.17,4307.7 C15.1@3114.7,4292.17
ADC_3V0_REF: R42.2 U4.6 | length 76.8
  Top Layer w6.25: U4.6@3161.8,2536.6 3161.8,2610.3 R42.2@3164,2612.5
ADC_A0A1_N: J1.11 R11.2 | length 207.4
  Bottom Layer w6.25: J1.11@2786.61,4429.17 2907.72,4429.17 2968.06,4489.52 R11.2@2969.05,4489.52
ADC_A0A1_P: J1.9 R10.2 | length 221.8
  Bottom Layer w6.25: J1.9@2786.61,4460.67 2873.03,4460.67 2968.06,4555.7 R10.2@2969.05,4555.7
ADC_A2A3_N: J1.17 R13.2 | length 191.7
  Bottom Layer w6.25: J1.17@2786.61,4334.69 2793.33,4341.4 2826.35,4341.4 2826.52,4341.58 2953.47,4341.58 R13.2@2969.05,4357.15
ADC_A2A3_P: J1.15 R12.2 | length 206.1
  Bottom Layer w6.25: J1.15@2786.61,4366.18 2910.91,4366.18 2968.06,4423.33 R12.2@2969.05,4423.33
ADC_A4A5_N: J1.23 R15.2 | length 188.8
  Bottom Layer w6.25: J1.23@2786.61,4240.2 2953.64,4240.2 R15.2@2969.05,4224.79
ADC_A4A5_P: J1.21 R14.2 | length 190.4
  Bottom Layer w6.25: J1.21@2786.61,4271.69 2790.32,4275.4 2953.47,4275.4 R14.2@2969.05,4290.97
ADC_B0B1_N: J1.14 R20.2 | length 393.3
  Top Layer w6.25: v1(2671,4398) 2876.39,4398 2951.44,4473.05 2951.44,4474.03 2967.01,4489.61 R20.2@2968,4489.61
  Bottom Layer w6.25: J1.14@2613.39,4397.68 2613.71,4398 v1(2671,4398)
ADC_B0B1_P: J1.12 R19.2 | length 407.6
  Top Layer w6.25: v1(2671,4430) 2842.3,4430 2951.44,4539.14 2951.44,4540.12 2967.01,4555.7 R19.2@2968,4555.7
  Bottom Layer w6.25: J1.12@2613.39,4429.17 2614.21,4430 v1(2671,4430)
ADC_B2B3_N: J1.20 R22.2 | length 377.8
  Top Layer w6.25: v1(2674,4303) 2913.57,4303 2951.44,4340.87 2951.44,4341.85 2967.01,4357.43 R22.2@2968,4357.43
  Bottom Layer w6.25: J1.20@2613.39,4303.19 2613.58,4303 v1(2674,4303)
ADC_B2B3_P: J1.18 R21.2 | length 392.6
  Top Layer w6.25: v1(2672,4334) 2878.48,4334 2951.44,4406.96 2951.44,4407.94 2967.01,4423.52 R21.2@2968,4423.52
  Bottom Layer w6.25: J1.18@2613.39,4334.69 2614.07,4334 v1(2672,4334)
ADC_B4B5_N: J1.26 R24.2 | length 361.6
  Top Layer w6.25: v1(2670.3,4208.7) 2925.95,4208.7 2942.6,4225.36 2967.89,4225.36 R24.2@2968,4225.25
  Bottom Layer w6.25: J1.26@2613.39,4208.7 v1(2670.3,4208.7)
ADC_B4B5_P: J1.24 R23.2 | length 377.4
  Top Layer w6.25: v1(2669,4239) 2915.66,4239 2951.44,4274.78 2951.44,4275.76 2967.01,4291.34 R23.2@2968,4291.34
  Bottom Layer w6.25: J1.24@2613.39,4240.2 2667.8,4240.2 v1(2669,4239)
ADC_C2C3_N: J1.33 R27.2 | length 233.2
  Bottom Layer w6.25: J1.33@2786.61,4082.72 2845.41,4082.72 2968.06,3960.06 R27.2@2969.05,3960.06
ADC_C2C3_P: J1.31 R26.2 | length 218.9
  Bottom Layer w6.25: J1.31@2786.61,4114.21 2786.83,4114 2841,4114 2928.76,4026.24 R26.2@2969.05,4026.24
ADC_C4C5_N: J1.39 R29.2 | length 272.8
  Bottom Layer w6.25: J1.39@2786.61,3988.23 2793.33,3981.51 2826.49,3981.51 2890.65,3917.35 2890.65,3876.52 2939.47,3827.7 R29.2@2969.05,3827.7
ADC_C4C5_P: J1.37 R28.2 | length 234.6
  Bottom Layer w6.25: J1.37@2786.61,4019.72 2842.22,4019.72 2968.06,3893.88 R28.2@2969.05,3893.88
ADC_D0D1_N: J1.30 R32.2 | length 377
  Top Layer w6.25: v1(2671.29,4145.71) 2915.35,4145.71 2951.44,4109.62 2951.44,4108.64 2967.01,4093.06 R32.2@2968,4093.06
  Bottom Layer w6.25: J1.30@2613.39,4145.71 v1(2671.29,4145.71)
ADC_D0D1_P: J1.28 R31.2 | length 362.7
  Top Layer w6.25: v1(2671,4178) 2674.18,4178 2677.45,4174.73 2952.42,4174.73 R31.2@2968,4159.15
  Bottom Layer w6.25: J1.28@2613.39,4177.21 2670.21,4177.21 v1(2671,4178)
ADC_D2D3_N: J1.36 R34.2 | length 392.6
  Top Layer w6.25: v1(2670.22,4051.22) 2877.66,4051.22 2951.44,3977.44 2951.44,3976.46 2967.01,3960.88 R34.2@2968,3960.88
  Bottom Layer w6.25: J1.36@2613.39,4051.22 v1(2670.22,4051.22)
ADC_D2D3_P: J1.34 R33.2 | length 378.3
  Top Layer w6.25: v1(2669.72,4082.72) 2912.26,4082.72 2951.44,4043.53 2951.44,4042.55 2967.01,4026.97 R33.2@2968,4026.97
  Bottom Layer w6.25: J1.34@2613.39,4082.72 v1(2669.72,4082.72)
ADC_D4D5_N: J1.42 R36.2 | length 408.2
  Top Layer w6.25: v1(2671,3956) 2840.7,3956 2951.44,3845.26 2951.44,3844.28 2967.01,3828.7 R36.2@2968,3828.7
  Bottom Layer w6.25: J1.42@2613.39,3956.73 2670.27,3956.73 v1(2671,3956)
ADC_D4D5_P: J1.40 R35.2 | length 393.9
  Top Layer w6.25: v1(2670.23,3988.23) 2874.56,3988.23 2951.44,3911.35 2951.44,3910.37 2967.01,3894.79 R35.2@2968,3894.79
  Bottom Layer w6.25: J1.40@2613.39,3988.23 v1(2670.23,3988.23)
ADC_IN1415_N: J1.27 R18.2 | length 217.5
  Bottom Layer w6.25: J1.27@2786.61,4177.21 2883.28,4177.21 2968.06,4092.43 R18.2@2969.05,4092.43
ADC_IN1415_P: J1.25 R17.2 | length 203.2
  Bottom Layer w6.25: J1.25@2786.61,4208.7 2917.97,4208.7 2968.06,4158.61 R17.2@2969.05,4158.61
ADC_REF: C33.1 R43.2 U3.2 U3.5 U3.11 U3.14 | length 77
  Top Layer w6.25: v1(3237,2820) 3237,2785.5 C33.1@3238.5,2784
  Bottom Layer w6.25: R43.2@3235,2779.84 3237,2781.84 v1@3237,2819.35
B0B1_N: C5.1 R20.1 U1.W2 | length 117.9
  Top Layer w6.25: R20.1@3030.99,4489.61 3044.9,4475.7 3099.83,4475.7 C5.1@3114.7,4490.56 ; v1(4574.06,3720.04) U1.W2@4589.8,3735.79
  other v1: 3072.37,4475.7
B0B1_P: C17.1 R19.1 U1.V2 | length 118
  Top Layer w6.25: R19.1@3030.99,4555.7 3044.99,4541.7 3099.7,4541.7 C17.1@3114.7,4556.7 ; v1(4574.06,3751.54) U1.V2@4589.8,3767.28
  other v1: 3072.35,4541.7
B2B3_N: C6.1 R22.1 U1.W3 | length 118.5
  Top Layer w6.25: R22.1@3030.99,4357.43 3045.72,4342.7 3098.11,4342.7 3113.72,4358.3 C6.1@3114.7,4358.3 ; v1(4605.55,3720.04) U1.W3@4621.3,3735.79
  other v1: 3071.92,4342.7
B2B3_P: C18.1 R21.1 U1.V3 | length 118.6
  Top Layer w6.25: R21.1@3030.99,4423.52 3045.81,4408.7 3097.98,4408.7 3113.72,4424.43 C18.1@3114.7,4424.43 ; v1(4605.55,3751.54) U1.V3@4621.3,3767.28
  other v1: 3071.9,4408.7
B4B5_N: C7.1 R24.1 U1.W4 | length 118.4
  Top Layer w6.25: R24.1@3030.99,4225.25 3045.54,4210.7 3099.36,4210.7 C7.1@3114.7,4226.04 ; v1(4637.05,3720.04) U1.W4@4652.8,3735.79
  other v1: 3072.45,4210.7
B4B5_P: C19.1 R23.1 U1.V4 | length 118.5
  Top Layer w6.25: R23.1@3030.99,4291.34 3045.63,4276.7 3099.23,4276.7 C19.1@3114.7,4292.17 ; v1(4637.05,3751.54) U1.V4@4652.8,3767.28
  other v1: 3072.43,4276.7
bMCU_GPIO0: J1.49 U24.2 | length 899.1
  Top Layer w6.25: U24.2@3505.87,3835.69 3507.52,3837.35 3565.35,3837.35 v1(3567,3839)
  Bottom Layer w6.25: J1.49@2786.61,3830.75 2790.06,3827.3 2831.7,3827.3 2892,3767 3431,3767 3503,3839 v1(3567,3839)
bMCU_GPIO1: J1.51 U24.3 | length 899.5
  Top Layer w6.25: U24.3@3505.87,3816.01 3506.37,3815.5 3567.5,3815.5 v1(3568,3815)
  Bottom Layer w6.25: J1.51@2786.61,3799.25 2793.33,3792.53 2829.47,3792.53 2882,3740 3440,3740 3515,3815 v1(3568,3815)
bMCU_GPIO2: J1.53 U24.5 | length 892.5
  Top Layer w6.25: U24.5@3505.87,3776.64 3506.55,3777.32 3566.32,3777.32 v1(3567,3778)
  Bottom Layer w6.25: J1.53@2786.61,3767.76 2816.14,3767.76 2871.9,3712 3451,3712 3517,3778 v1(3567,3778)
bMCU_GPIO3: J1.55 U24.6 | length 892.6
  Top Layer w6.25: U24.6@3505.87,3756.95 3507.34,3755.48 3565.52,3755.48 v1(3567,3754)
  Bottom Layer w6.25: J1.55@2786.61,3736.26 2816.14,3736.26 2867.4,3685 3466,3685 3535,3754 v1(3567,3754)
bMCU_GPIO4: J1.50 U24.8 | length 1061.6
  Top Layer w6.25: U24.8@3505.87,3717.58 3507.57,3719.29 3565.29,3719.29 v1(3567,3721)
  Signal layer 3 w6.25: v1(2668.25,3830.75) 2778,3721 v1(3567,3721)
  Bottom Layer w6.25: J1.50@2613.39,3830.75 v1(2668.25,3830.75)
bMCU_GPIO5: J1.52 U24.9 | length 1060.6
  Top Layer w6.25: U24.9@3505.87,3697.9 3508.65,3695.12 3510.48,3696.95 3566.05,3696.95 v1(3567,3696)
  Signal layer 3 w6.25: v1(2670,3799) 2774,3695 3566,3695 v1(3567,3696)
  Bottom Layer w6.25: J1.52@2613.39,3799.25 2669.75,3799.25 v1(2670,3799)
bMCU_GPIO6: J1.54 U24.11 | length 1063.6
  Top Layer w6.25: U24.11@3505.87,3658.53 3507.1,3659.76 3565.17,3659.76 v1(3566.41,3661)
  Signal layer 3 w6.25: v1(2668.88,3767.88) 2781.17,3655.58 3559.4,3655.58 3564.82,3661 v1(3566.41,3661)
  Bottom Layer w6.25: J1.54@2613.39,3767.76 2668.76,3767.76 v1@2669,3768
bMCU_GPIO7: J1.56 U24.12 | length 1072.2
  Top Layer w6.25: U24.12@3505.87,3638.84 3508.65,3636.06 3535.38,3636.06 3535.44,3636 v1(3567,3636)
  Signal layer 3 w6.25: v1(2669,3737) 2785.97,3620.03 3552.56,3620.03 3567,3634.47 v1(3567,3636)
  Bottom Layer w6.25: J1.56@2613.39,3736.26 2668.26,3736.26 v1(2669,3737)
bMCU_GPIO8: J1.59 U24.13 | length 2277.4
  Top Layer w6.25: 2748.5,2771 2750.98,2773.48 2832,2773.48 2832,2832 2962,2962 2962,3229 3352.16,3619.16 U24.13@3505.87,3619.16 ; 2752,2835.5 2901,2984.5 2901,3612 v1(2839.73,3673.27)
  Bottom Layer w6.25: J1.59@2786.61,3673.27 v1(2839.73,3673.27)
bMCU_GPIO9: J1.61 U24.14 | length 2422.4
  Top Layer w6.25: 2685.5,2697.26 2685.5,2864.5 2873,3052 2873,3608 v1(2840,3641) ; 2748.5,2697.26 2751.02,2694.74 2832,2694.74 2832,2707.86 2844.6,2720.45 2844.6,2721.6 2872,2749 2872,2819 3008,2955 3008,3213 3394.47,3599.47 U24.14@3505.87,3599.47
  Bottom Layer w6.25: J1.61@2786.61,3641.77 2787.39,3641 v1(2840,3641)
bMCU_GPIO10: J1.63 U24.16 | length 1172
  Top Layer w6.25: 2910.74,2773.48 3056,2918.74 3056,3198 3418.1,3560.1 U24.16@3505.87,3560.1
  Bottom Layer w6.25: 2910.74,2773.48 2994.02,2773.48 2997,2770.5
bMCU_GPIO11: J1.65 U24.17 | length 855.5
  Top Layer w6.25: U24.17@3505.87,3540.42 3506.07,3540.21 3565.79,3540.21 v1(3566,3540)
  Bottom Layer w6.25: J1.65@2786.61,3578.78 3527.22,3578.78 v1@3565.79,3540.21
bMCU_GPIO12: J1.60 U24.19 | length 1084.1
  Top Layer w6.25: U24.19@3505.87,3501.05 3506.84,3502.02 3565.02,3502.02 v1(3566,3503)
  Signal layer 3 w6.25: v1(2667.73,3673.27) 2838,3503 v1(3566,3503)
  Bottom Layer w6.25: J1.60@2613.39,3673.27 v1(2667.73,3673.27)
bMCU_GPIO13: J1.62 U24.20 | length 1082.2
  Top Layer w6.25: U24.20@3505.87,3481.36 3507.05,3480.18 3565.82,3480.18 v1(3566.41,3479.59)
  Signal layer 3 w6.25: v1(2670,3642) 2833,3479 3565.82,3479 v1(3566.41,3479.59)
  Bottom Layer w6.25: J1.62@2613.39,3641.77 2669.77,3641.77 v1(2670,3642)
bMCU_GPIO14: J1.64 U24.22 | length 1084.1
  Top Layer w6.25: U24.22@3505.87,3441.99 3564,3442 v1(3566,3444)
  Signal layer 3 w6.25: v1(2668.72,3610.28) 2837,3442 3564,3442 v1(3566,3444)
  Bottom Layer w6.25: J1.64@2613.39,3610.28 v1(2668.72,3610.28)
bMCU_GPIO15: J1.66 U24.23 | length 1082.3
  Top Layer w6.25: U24.23@3505.87,3422.31 3507.52,3420.65 3565.35,3420.65 v1(3567,3419)
  Signal layer 3 w6.25: v1(2669.78,3578.78) 2829.56,3419 v1(3567,3419)
  Bottom Layer w6.25: J1.66@2613.39,3578.78 v1(2669.78,3578.78)
bMCU_GPIO16: J1.69 U27.2 | length 942.3
  Top Layer w6.25: U27.2@3505.87,3285.69 3563.51,3285.69 v1(3568.82,3291)
  Bottom Layer w6.25: J1.69@2786.61,3515.79 3347.21,3515.79 3568.82,3294.18 v1(3568.82,3291)
bMCU_GPIO17: J1.71 U27.3 | length 940.1
  Top Layer w6.25: U27.3@3505.87,3266.01 3560.81,3266.01 3565.82,3261 v1(3569,3261)
  Bottom Layer w6.25: J1.71@2786.61,3484.29 3345.71,3484.29 v1(3569,3261)
bMCU_GPIO18: J1.73 U27.5 | length 939.2
  Top Layer w6.25: U27.5@3505.87,3226.64 3561.46,3226.64 3565.82,3231 v1(3569,3231)
  Bottom Layer w6.25: J1.73@2786.61,3452.8 3347.2,3452.8 v1(3569,3231)
bMCU_GPIO19: J1.75 U27.6 | length 937.6
  Top Layer w6.25: U27.6@3505.87,3206.95 3561.87,3206.95 3565.82,3203 v1(3569,3203)
  Bottom Layer w6.25: J1.75@2786.61,3421.3 3350.7,3421.3 v1(3569,3203)
bMCU_GPIO20: J1.70 U27.8 | length 1163.2
  Top Layer w6.25: U27.8@3505.87,3167.58 3560.4,3167.58 3565.82,3173 v1(3569,3173)
  Signal layer 3 w6.25: v1(2669,3516) 2791,3394 3348,3394 v1(3569,3173)
  Bottom Layer w6.25: J1.70@2613.39,3515.79 2613.6,3516 v1(2669,3516)